# Altium PCB HGD_MCU(v0.2)-20200901.PcbDoc
Units mil, origin at the board's own origin, x right, y up, seen from the top; angles counter-clockwise.
Board outline 2265 x 2461.06 mil, 2 copper layers (TopLayer, BottomLayer); 55 components, 42 nets, 246 pads, 476 vias.
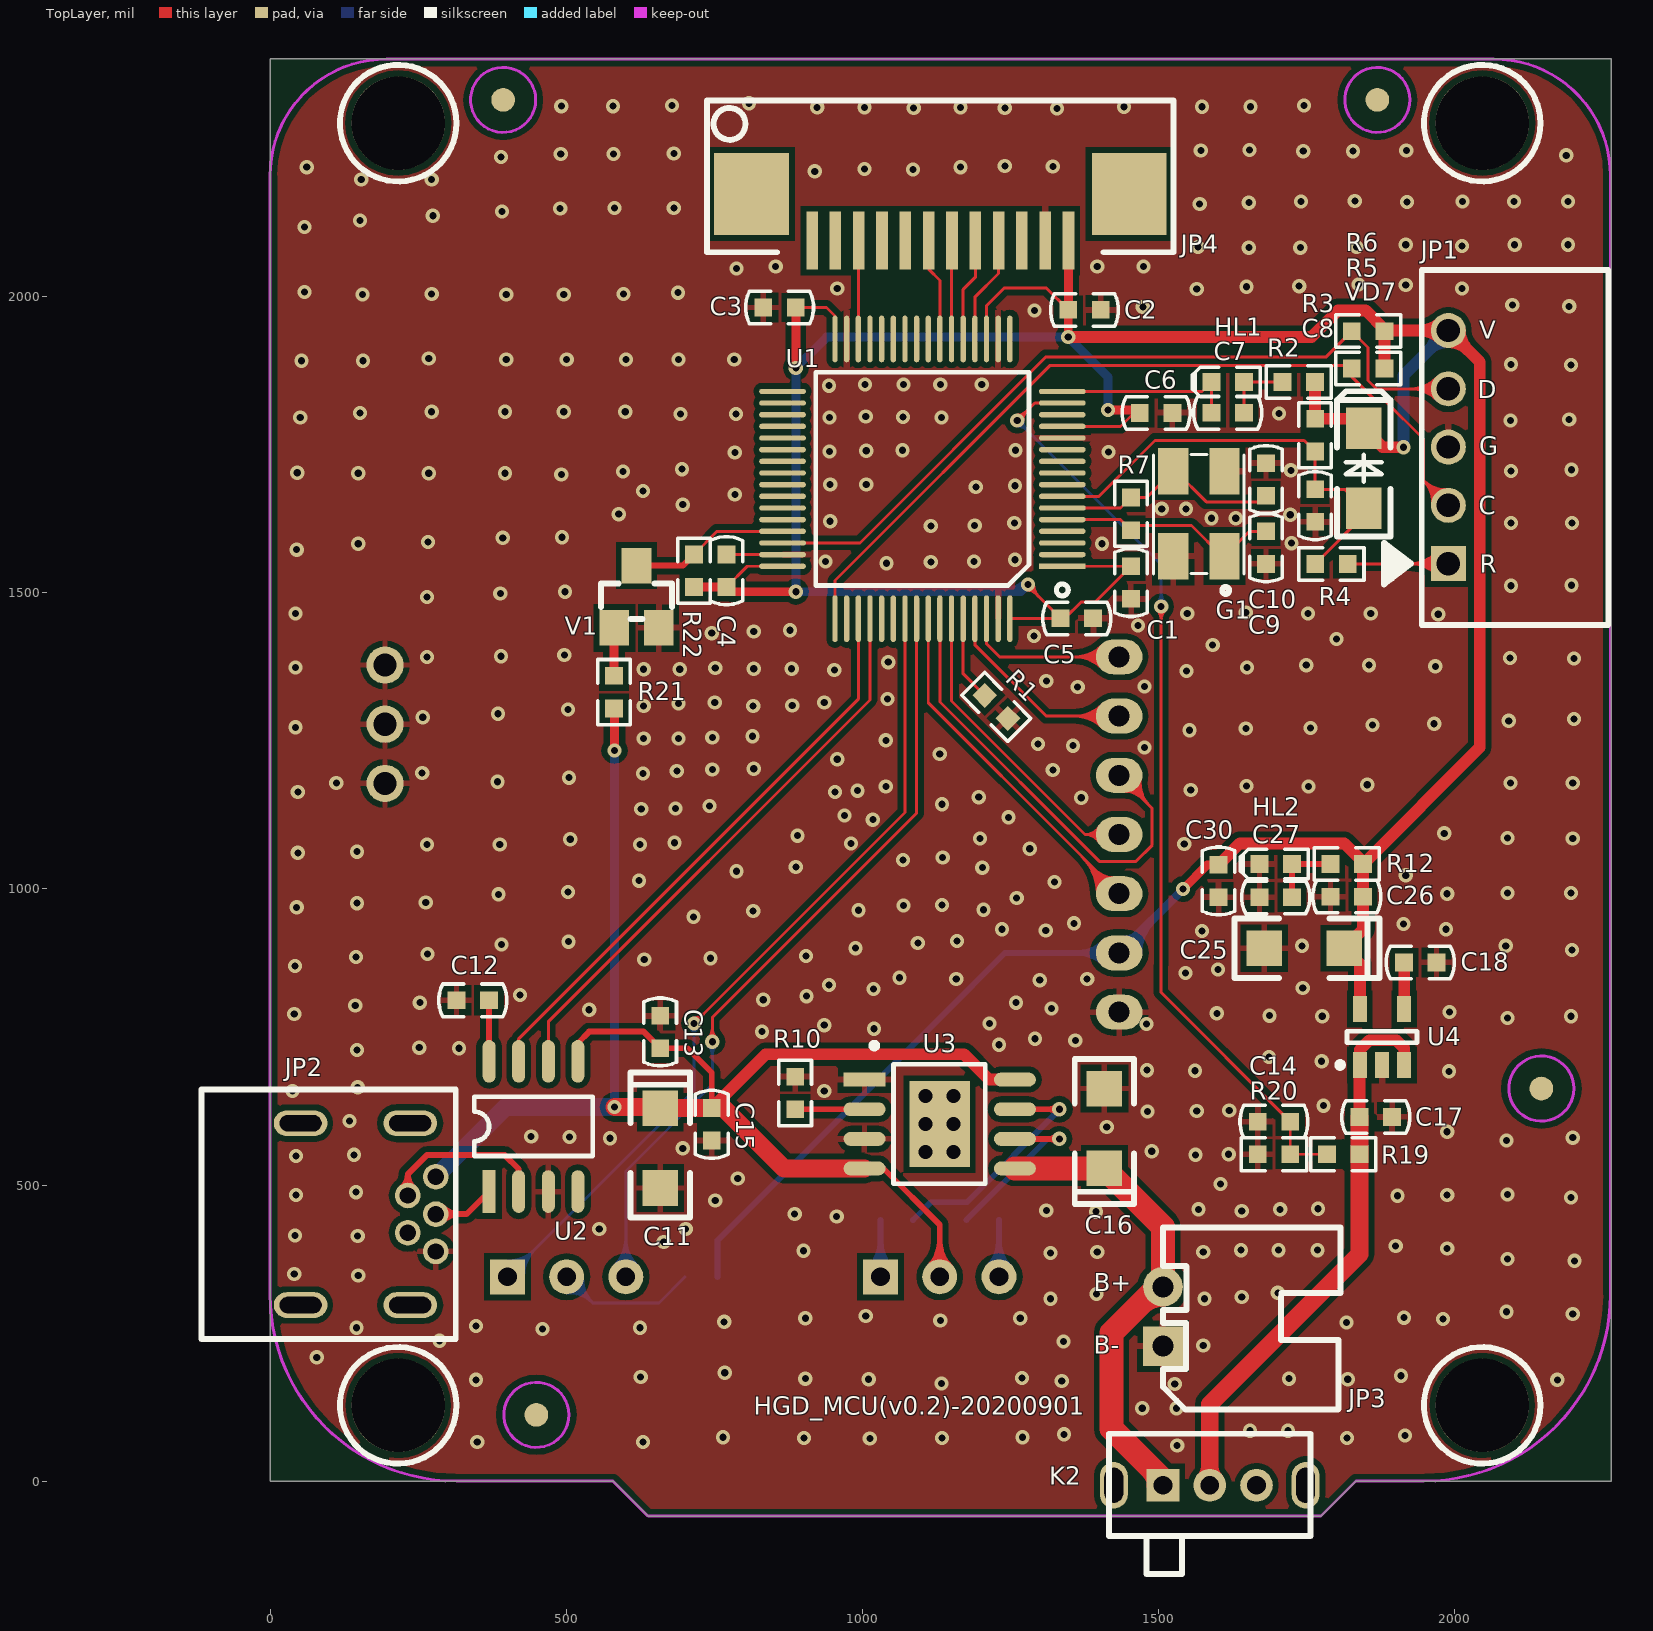
[diagram p0: TopLayer view]
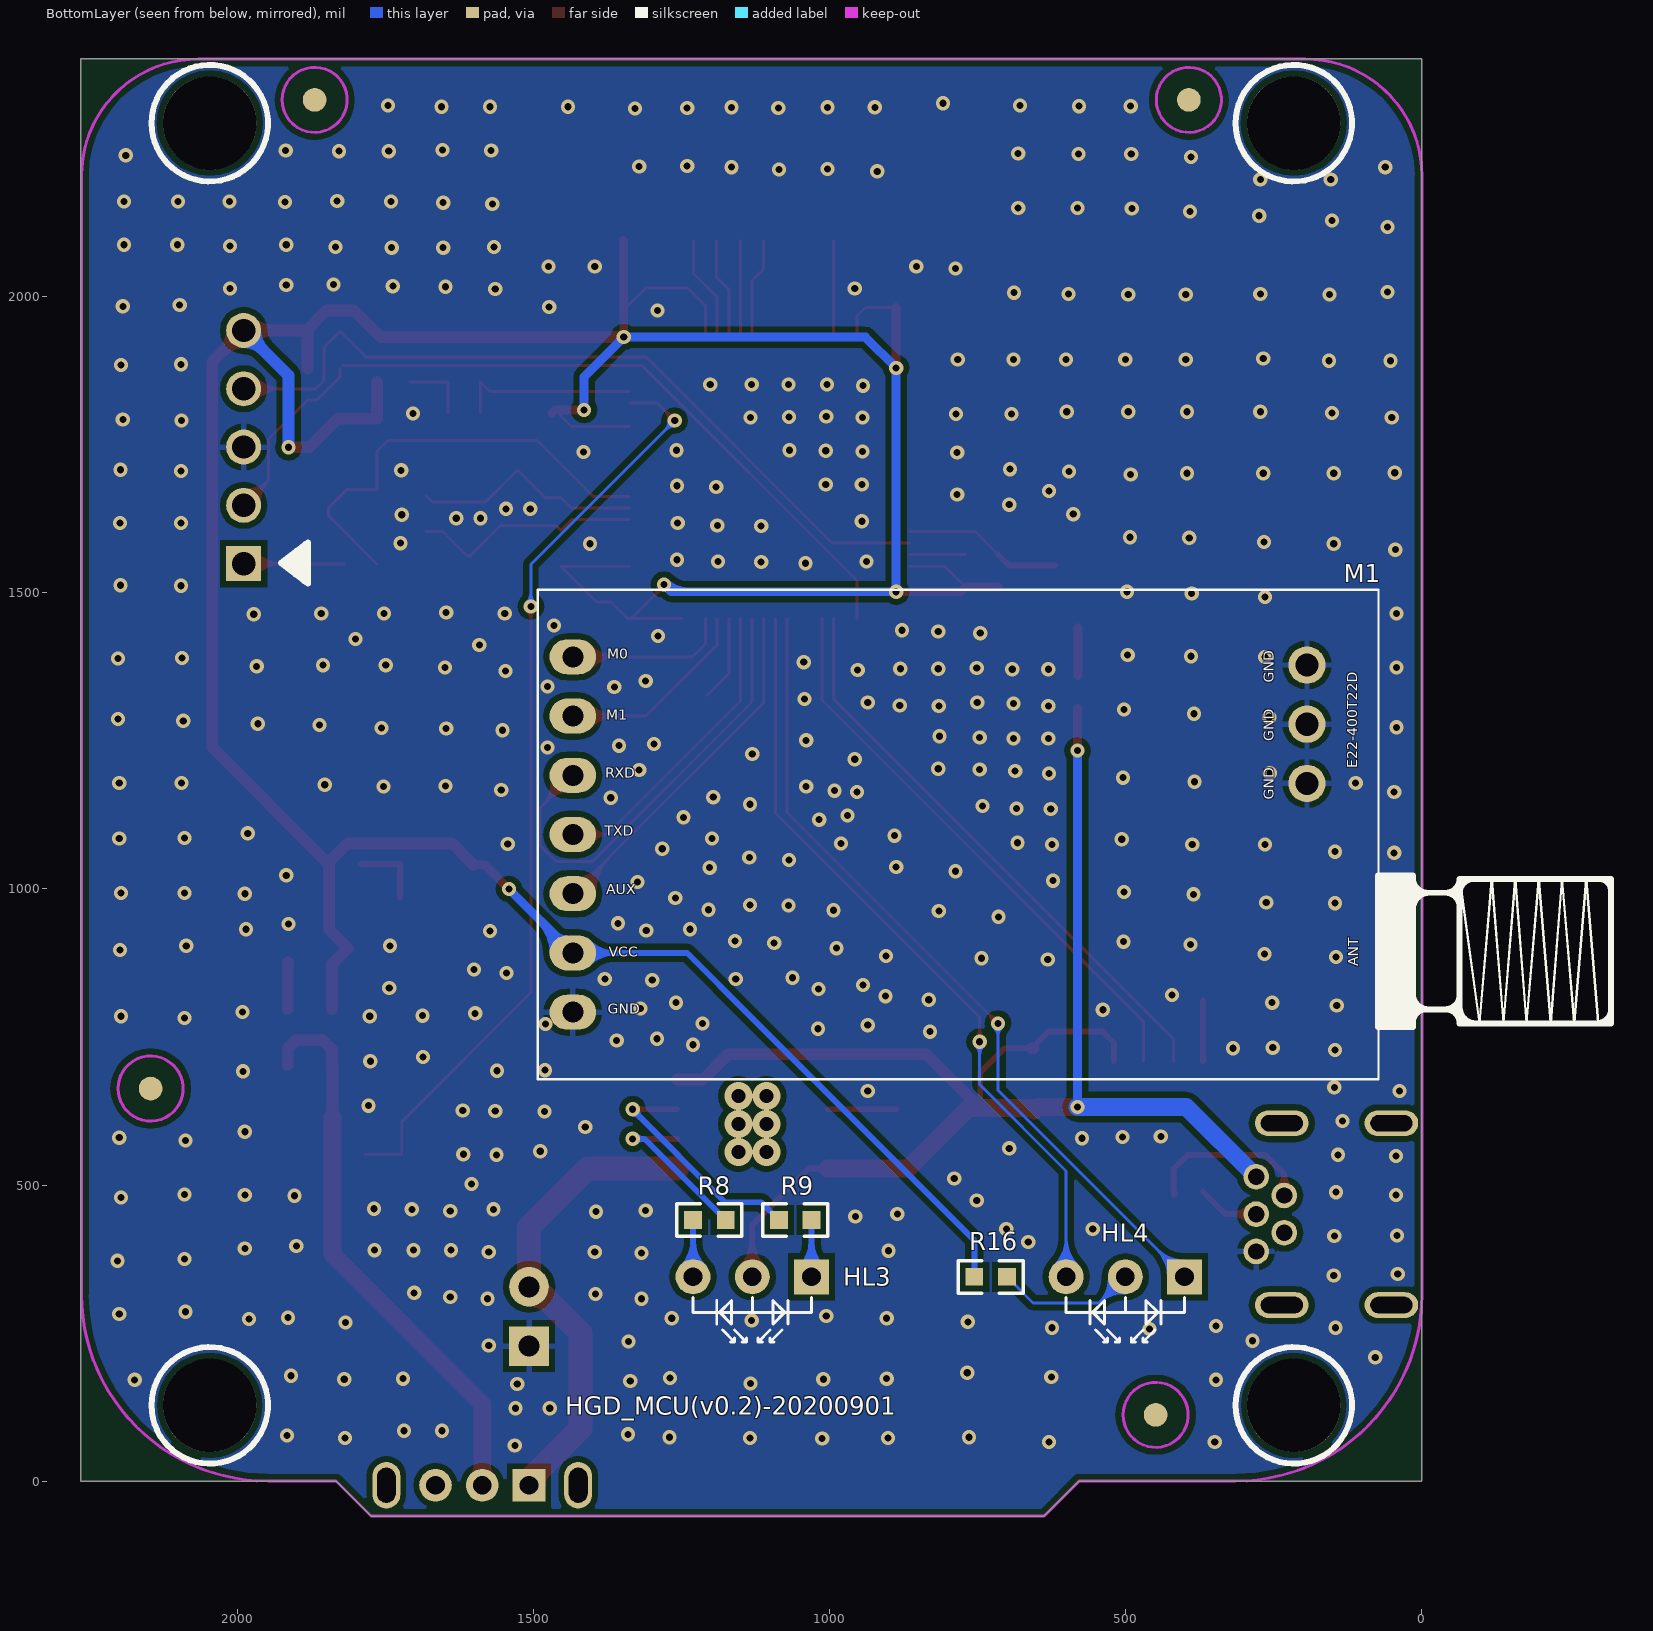
[diagram p1: BottomLayer view, seen from below]

## Layer stack, top to bottom
TopLayer: signal copper 1.4
Dielectric: core 12.6, FR-4, Dk 4.8
BottomLayer: signal copper 1.4

## Board outline
0,0 578.91,0 637.96,-59.06 1774.94,-59.06 1834,0 2215,0 2265,0 2265,2387 2265,2402 0,2402 0,0

## Design rules (kind name [scope] priority, off if disabled: settings)
Clearance Clearance_2 [InNet('RF_IN') vs InNet('GND')] p1: gap=19.68
Clearance [All] p2: gap=10
Clearance Clearance_1 [All] p3: gap=10
ComponentClearance [All] p1 off: gap=10 collisioncheckmode=3 verticalgap=10 showdistances=FALSE
FabricationTestPointUsage TestPointUsage [All] p1: valid=0 allowmultiple=FALSE
FabricationTestpoint Testpoint [(IsPad And (OnTopLayer Or OnBottomLayer))] p1: side=3 testpointundercomponent=TRUE minsize=40 maxsize=100 preferedsize=60 minholesize=20 maxholesize=40 preferedholesize=32 testpointgrid=1 allowsidetop=TRUE allowsidebottom=TRUE usegrid=TRUE gridtolerance=0.01
HoleSize [All] p1: absolutevalues=TRUE maxlimit=200 minlimit=1 maxpercent=80.000 minpercent=20.000
PolygonConnect [IsVia] p1: connectstyle=Direct reliefconductorwidth=10 reliefentries=4 polygonreliefangle="90 Angle"
PolygonConnect PolygonConnect_via [All] p2 off: connectstyle=Relief reliefconductorwidth=10 reliefentries=4 polygonreliefangle="90 Angle"
RoomDefinition HGD_MCU(v0.2)-20200901 [InComponentClass('HGD_MCU(v0.2)-20200901')] p1: confinementstyle=ConfineIn formatcopy=TRUE lockcomponents=FALSE outline -14648,-34893 -12648,-34893 -12648,-33893 -14648,-33893
RoutingVias [All] p1: holewidth=15.75 width=31.5 viastyle="Through Hole" minholewidth=11.81 minwidth=23.62 maxholewidth=19.68 maxwidth=39.37
ShortCircuit [All] p1 off: allowed=FALSE
SilkscreenOverComponentPads [All] p1: minsilkscreentomaskgap=10
SolderMaskExpansion [All] p1: expansion=4
Width [All] p1: maxlimit=100 minlimit=5 preferedwidth=10
22 further rules are at their usual default settings.

## Components (designator, comment, footprint, x,y, rotation, side; value= is the part's Value field where it differs from the comment)
C1 "100nF/25V/5%" C0603 1454,1490 r90 top
C2 "100nF/25V/5%" C0603 1348,1978 r0 top
C3 "100nF/25V/5%" C0603 888,1982 r180 top
C4 "100nF/25V/5%" C0603 771,1565 r270 top
C5 "100nF/25V/5%" C0603 1390,1457 r180 top
C6 "100nF/25V/5%" C0603 1524,1804 r180 top
C7 "100nF/25V/5%" C0603 1644.85,1804.25 r180 top
C8 "100nF/25V/5%" C0603 1765,1675 r270 top
C9 "20pF/25V/1%" C0603 1682,1549 r90 top
C10 "20pF/25V/1%" C0603 1682,1664 r90 top
C11 "10uF/25V/5%" C1206-1 659,630 r270 top
C12 "100nF/25V/5%" C0603 315,812 r0 top
C13 "100nF/25V/5%" C0603 659,731 r90 top
C14 "100nF/25V/5%" C0603 1723,607 r180 top
C15 "100nF/25V/5%" C0603 746,630 r270 top
C16 "10uF/25V/5%" C1206-1 1409,528 r90 top
C17 "100nF/25V/5%" C0603 1840,615 r0 top
C18 "10nF/25V/5%" C0603 1970,876 r180 top
C25 "2.2uF/25V/5%" C1206-1 1814,900 r180 top
C26 "100nF/25V/5%" C0603 1791,987 r0 top
C27 "100nF/25V/5%" C0603 1726,986 r180 top
C30 "100nF/25V/5%" C0603 1602,986 r90 top
G1 "16MHz" OSC5032 1612,1562 r90 top
HL1 "LED蓝灯" LED0603 1644.85,1856.25 r180 top
HL2 "LED蓝灯" LED0603 1726,1042 r180 top
HL3 "LED红绿双色" LED2_Common_Anode 1031,345 r0 bottom locked
HL4 "LED红绿双色" LED2_Common_Anode 401,345 r0 bottom locked
JP1 "SWD" XH2.54-5AW 1990,1451 r90 top locked
JP2 "MiniUSB-B" MiniUSB-B 280,450.89 r270 top locked
JP3 "XH2.54-2P" XH2.54-2AW 1508,278 r90 top
JP4 "FPC-12P" FPC-1.0MM-12P-W 1132,2095 r0 top locked
K2 "SK-12D07开关" SK-12D07 1587,-7 r0 top
M1 "E22-400T22D" E22-400T22D 1434,1392 r180 bottom locked
R1 "10K/5%" R0603 1246,1288 r135 top
R2 "10K/5%" R0603 1764.85,1856 r180 top
R3 "10K/5%" R0603 1765,1739 r90 top
R4 "1K/5%" R0603 1820,1549 r180 top
R5 "10K/5%" R0603 1827,1879 r0 top
R6 "10K/5%" R0603 1827,1942 r0 top
R7 "1M/1%" R0603 1454,1606 r90 top
R8 "1K/5%" R0603 1176,441 r0 bottom
R9 "1K/5%" R0603 1086,441 r180 bottom
R10 "1K5/5%" R0603 887,683 r270 top
R12 "2K/5%" R0603 1846,1042 r180 top
R16 "10K/5%" R0603 756,345 r180 bottom
R19 "10M/1%" R0603 1840,552 r180 top
R20 "10M/1%" R0603 1723,552 r180 top
R21 "10K/5%" R0603 581,1360 r270 top
R22 "1K/5%" R0603 716,1510 r90 top
U1 "STM32F105RCT6" LQFP64_STM32F105R 1338,1545 r180 top locked
U2 "CH340N" CH340N_SOP8 370,489 r0 top locked
U3 "TP4056" TP4056_SOP8_SOP127P600X175-8N 1131,603 r0 top locked
U4 "TPS73033DBVR" SGM2019_SOT23-5_95P280X125-5N 1878,750 r90 top
V1 "S8050" SOT-23 619,1546 r0 top
VD7 "1N4148" LL-34 1847,1643 r90 top

## Footprints (in the part's own frame and the unit in brackets; to place one, negate y for a bottom-side part, rotate by r counter-clockwise, add the part's x,y. Pads: shape width x height; smd on the part's side, far side on the other; paste and mask are expansions set on the pad)
C0603 [mil]
  rect 30x30 smd: 1(0,0) 2(55,0)
  silkscreen extent -30,-28 85,28
C1206-1 [mil] "C1206封装钽电容"
  rect 60x60 smd: 1(0,0) 2(135,0)
  silkscreen extent -60,-50 185,50
CH340N_SOP8 [mil]
  rect 22x72 smd: 1(0,0)
  oval 22x72 smd: 2(50,0) 3(100,0) 4(150,0) 5(150,220) 6(100,220) 7(50,220) 8(0,220)
  silkscreen extent -25,60 175,160
E22-400T22D [mm]
  oval 2x1.5 hole 0.9: 1(0,0) 2(0,-2.54) 3(0,-5.08) 4(0,-7.62) 5(0,-10.16) 6(0,-12.7) 7(0,-15.24)
  round 1.6 hole 1: 8(31.49,-5.43) 9(31.49,-2.89) 10(31.49,-0.35)
  silkscreen extent -1.51,-18.12 44.54,2.88
FPC-1.0MM-12P-W [mm] "FPC-1.0MM-12P-W：卧式，抽拉式上接，12P"
  rect 3.2x3.5 smd: 0(-8.1,2) 0(8.1,2)
  rect 0.5x2.5 smd: 1(-5.5,0) 2(-4.5,0) 3(-3.5,0) 4(-2.5,0) 5(-1.5,0) 6(-0.5,0) 7(0.5,0) 8(1.5,0) 9(2.5,0) 10(3.5,0) 11(4.5,0) 12(5.5,0)
  silkscreen extent -10,-0.5 10,6
LED2_Common_Anode [mm] "LED2_Common_Anode：双色3mm共阳极LED"
  rect 1.5x1.5 hole 0.8: 1(0,0)
  round 1.5 hole 0.8: 2(2.54,0) 3(5.08,0)
  silkscreen extent 0,0.89 5.08,2.79
LED0603 [mil]
  rect 30x30 smd: A(0,0) K(55,0)
  silkscreen extent -28,-25 87,25
LL-34 [mil] "开关二极管LL-34封装"
  rect 70x60 smd: A(0,0) K(135,0)
  silkscreen extent -48,-45 198,45
LQFP64_STM32F105R [mm]
  rect 2x0.229 smd: 1(0,0)
  oval 2x0.229 smd: 2(0,-0.5) 3(0,-1) 4(0,-1.5) 5(0,-2) 6(0,-2.5) 7(0,-3) 8(0,-3.5) 9(0,-4) 10(0,-4.5) 11(0,-5) 12(0,-5.5) 13(0,-6) 14(0,-6.5) 15(0,-7) 16(0,-7.5) 33(12,-7.5) 34(12,-7) 35(12,-6.5) 36(12,-6) 37(12,-5.5) 38(12,-5) 39(12,-4.5) 40(12,-4) 41(12,-3.5) 42(12,-3) 43(12,-2.5) 44(12,-2) 45(12,-1.5) 46(12,-1) 47(12,-0.5) 48(12,0)
  oval 0.229x2 smd: 17(2.25,-9.75) 18(2.75,-9.75) 19(3.25,-9.75) 20(3.75,-9.75) 21(4.25,-9.75) 22(4.75,-9.75) 23(5.25,-9.75) 24(5.75,-9.75) 25(6.25,-9.75) 26(6.75,-9.75) 27(7.25,-9.75) 28(7.75,-9.75) 29(8.25,-9.75) 30(8.75,-9.75) 31(9.25,-9.75) 32(9.75,-9.75) 49(9.75,2.25) 50(9.25,2.25) 51(8.75,2.25) 52(8.25,2.25) 53(7.75,2.25) 54(7.25,2.25) 55(6.75,2.25) 56(6.25,2.25) 57(5.75,2.25) 58(5.25,2.25) 59(4.75,2.25) 60(4.25,2.25) 61(3.75,2.25) 62(3.25,2.25) 63(2.75,2.25) 64(2.25,2.25)
  silkscreen extent -0.25,-8.32 10.57,1.27
MiniUSB-B [mm]
  oval 1.1x2.3 hole 0.7 slot 1.8 at 90 deg: 0(-3.9,-1.1) 0(-3.9,-5.8) 0(3.9,-1.1) 0(3.9,-5.8)
  round 1.1 hole 0.7: 1(-1.6,0) 2(-0.8,-1.2) 3(0,0) 4(0.8,-1.2) 5(1.6,0)
  silkscreen extent -5.35,-10.05 5.35,0.85
OSC5032 [mm]
  rect 2x1.3 smd: 1(0,0) 2(3.65,0) 3(3.65,2.2) 4(0,2.2)
  silkscreen extent -1.62,-0.84 4.37,3.05
R0603 [mil]
  rect 30x30 smd: 1(0,0) 2(55,0)
  silkscreen extent -28,-28 82,27
SGM2019_SOT23-5_95P280X125-5N [mm] "SOT23, 5-Leads, Body 3.0x3.0mm (max), Pitch 0.95mm, IPC Medium Density"
  rect 1.1x0.6 smd: 1(-1.2,0.95) 2(-1.2,0) 3(-1.2,-0.95) 4(1.2,-0.95) 5(1.2,0.95)
  silkscreen extent -1.32,-1.5 0.25,1.92, body extent -0.85,-1.51 0.85,1.51, height 1.25
SK-12D07 [mm]
  oval 1.2x2 hole 0.8 slot 1.5 at 90 deg: 0(-4.115,0) 0(4.115,0)
  rect 1.4x1.4 hole 0.8: 1(-2.007,0)
  round 1.4 hole 0.8: 2(0,0) 3(2.007,0)
  silkscreen extent -4.32,-3.81 4.32,2.21
SOT-23 [mil]
  rect 50x60 smd: B(-37.5,-105) C(0,0) E(37.5,-105)
  silkscreen extent -60,-90 60,-30
TP4056_SOP8_SOP127P600X175-8N [mm] "SOP, 8-Leads, Body 5.1x4.0mm (max), Pitch 1.27mm, IPC Medium Density"
  rect 2.6x3.7 smd: 0(0,0)
  rect 1.8x0.6 smd: 1(-3.225,1.905)
  oval 1.8x0.6 smd: 2(-3.225,0.635) 3(-3.225,-0.635) 4(-3.225,-1.905) 5(3.225,-1.905) 6(3.225,-0.635) 7(3.225,0.635) 8(3.225,1.905)
  silkscreen extent -2.93,-2.57 1.96,3.49, body extent -2,-2.55 2,2.55, height 1.75
XH2.54-2AW [mm] "2.54mm间距, 2P, 弯针插座"
  rect 1.7x1.7 hole 0.9: 1(-1.27,0)
  round 1.7 hole 0.9: 2(1.27,0)
  silkscreen extent -3.99,-7.62 3.81,0, body extent -3.77,-7.35 3.77,0.35, height 5.73
XH2.54-5AW [mm] "XH2.54-5P弯针插座"
  rect 1.5x1.5 hole 1: 1(2.5,0)
  round 1.5 hole 1: 2(5,0) 3(7.5,0) 4(10,0) 5(12.5,0)
  silkscreen extent -0.13,-6.86 15.1,2.75

## Part data
C1 C2 C3 C4 C5 C6 C8: library part CAP-SMD, "电容"
C7 C9 C10 C27: library part CAP, "电容"
C11 C16 C25: library part "Cap Pol1", "钽电容"
C12 C13 C15 C18 C26 C30: library part Cap, "电容"
C14 C17: library part CAP-SMD
G1: library part CRYSTAL_4, "两对电极压电晶体"
HL1 HL2: library part 发光二极管, "发光二极管"
HL3 HL4: library part LED2_Common_Anode, "LED2_Common_Anode：双色LED，共阳极"
JP1: library part JP_XH2.54-5AW, "XH2.54-5P直插插针"
JP2: "MiniUSB-B母头插座"
JP3: library part XH2.54-2AW, "XH2.54-2P弯针插座"
K2: library part SK-12D07, "SK-12D07：3脚2档小型拨动开关"
M1: "E22-400T22D LoRa模块"
R1 R2 R3 R4 R5 R6 R7 R8 R9 R10 R12 R16 R19 R20 R21 R22: library part RES2, "电阻"
U4: library part SGM2019, "SGM2019：Low Power, Low Dropout, RF Linear Regulators"
V1: library part NPN, "NPN三极管"
VD7: library part 开关二极管, "开关二极管"

## Free pads (board coordinates)
  round 157.48 hole 157.48: 0(216.54,127.95) 0(216.54,2293.31) 0(2047.24,127.95) 0(2047.24,2293.31)
  round 40 smd far side: 0(393.7,2332.68) 0(449.81,111.95) 0(1870.08,2332.68) 0(2147.08,662.95)
  round 40 smd: 1(393.7,2332.68) 1(449.81,111.95) 1(1870.08,2332.68) 1(2147.08,662.95)
  round 100 on Bottom Solder: 2(393.7,2332.68) 2(449.81,111.95) 2(1870.08,2332.68) 2(2147.08,662.95)
  round 100 on Top Solder: 3(393.7,2332.68) 3(449.81,111.95) 3(1870.08,2332.68) 3(2147.08,662.95)

## Via types
v1: diameter 24, hole 12, TopLayer to BottomLayer, tented both sides, 470 vias
v2: diameter 47.24, hole 23.62, TopLayer to BottomLayer, tented both sides, 6 vias

## Nets (pads, with @x,y where several pads share a name; then routed paths per layer and width w, separated by ;. In a path a pad name is that pad's centre, name@x,y a point inside that pad or via, vN(x,y) a via of type N, cw(c..) or ccw(c..) an arc to the next point about the centre after c; other vN are vias at no path point)
3V3: C1.2 C2.1 C3.1 C4.2 C5.2 C6.2 C25.1 C26.2 C30.2 JP1.5 JP4.12 M1.6 R2.1 R3.2 R5.2 R6.2 R12.1 R16.1 R22.1 U1.1 U1.13 U1.19 U1.32 U1.48 U1.64 U4.5 VD7.K | length 7412.5
  TopLayer w5: C4.2 806,1545 U1.48 ; C3.1 940,1982 954.14,1967.86 U1.32 ; U1.19 1210.05,1985.05 1240,2015 1311,2015 C2.1 ; U1.64@1250,1457 U1.64 C5.2@1334.42,1456.42 ; v1@1280,1504.5 cw(c1280,1486.39) 1292.8,1499.2 ; v1@1280,1512 C5.2 1342.32,1457 1369.82,1484.5 1393.5,1484.5 C1.2 U1.1 ; v1@1284.5,1514 ccw(c1300.19,1514) 1289.1,1502.9 ; v1@1289.5,1514 ccw(c1317.26,1514) 1297.63,1494.37 ; U1.13 1436.22,1781.22 C6.2@1459,1804
  TopLayer w15: R22.1 C4.2 ; C4.2@772,1509 C4.2 ; v1(888,1502) 779,1502 C4.2 ; v1(888,1880) C3.1 ; v1(1348,1932) C2.1 1348.54,1978.54 JP4.12 ; v1(1415,1809) 1464,1809 C6.2 ; v1(1542,1000) 1583,1041 C30.2 ; R6.2@1881.75,1942 R6.2
  TopLayer w20: v1(1348,1932) 1758.72,1932 1803.72,1977 1850.28,1977 1882,1945.28 R6.2 ; C30.2 1638,1077 1814.28,1077 1846,1045.28 R12.1 ; R2.1 1764.85,1794.15 R3.2 1831,1794 VD7.K 1879,1746 v1(1914,1746) ; U4.5 1840.6,873.4 C25.1 1846,932 C26.2 R12.1 ; R5.2 R6.2 ; JP1.5@1976.19,1929.32 ccw(c1942.86,1895.98) 1942.86,1943.13 ccw(c1942.86,1990.27) JP1.5@1976.19,1956.93 ; JP1.5@1990,1923.6 cw(c1990,1876.45) 2023.34,1909.79 cw(c2056.67,1943.13) JP1.5@2009.53,1943.13 ; R12.1 2043,1239 2043,1890.13 JP1.5 1883.13,1943.13 R6.2
  BottomLayer w5: M1.6@1430.5,888.5 M1.6
  BottomLayer w10: R16.1 756,406.82 1186,836.82 1186,837 1241,892 M1.6 ; M1.6@1406.81,874.66 ccw(c1364.94,832.79) 1364.94,892 ccw(c1364.94,951.21) M1.6@1406.81,909.34 ; M1.6@1413.89,881.73 ccw(c1389.08,856.93) 1389.08,892 ccw(c1389.08,927.07) M1.6@1413.89,902.27
  BottomLayer w15: 1240.17,1502 ccw(c1240.17,1553.83) v1@1276.82,1517.18 ; v1(1280,1514) 1268,1502 v1(888,1502) v1(888,1880) 940,1932 v1(1348,1932) 1415,1865 v1(1415,1809) ; M1.6 v1(1542,1000) ; M1.6@1443.84,914.03 ccw(c1443.84,943.44) 1464.64,922.64 ; M1.6@1450.87,892 cw(c1491.6,892) 1462.8,920.8 ; M1.6@1465.87,892 cw(c1542.81,892) 1488.41,946.41
  BottomLayer w20: v1(1914,1746) 1914,1867.13 JP1.5 ; JP1.5@1970.47,1943.13 cw(c1923.33,1943.13) 1956.66,1909.79 cw(c1990,1876.45) JP1.5@1990,1923.6
+5V: C11.1 C13.1 C15.1 HL3.2 JP2.1 R21.2 U2.5 U3.4 U3.8 | length 2917.4
  TopLayer w10: U2.5 520,740 539,759 631,759 C13.1 705,731 746,690 C15.1 ; U3.4 1036,528 1131,433 HL3.2 ; HL3.2@1113.66,362.34 ccw(c1071.79,404.21) 1131,404.21 ccw(c1190.21,404.21) HL3.2@1148.34,362.34 ; HL3.2@1120.73,355.27 ccw(c1095.93,380.07) 1131,380.07 ccw(c1166.07,380.07) HL3.2@1141.27,355.27
  TopLayer w15: R21.2 581.69,1304.31 v1(581.69,1233.69)
  TopLayer w20: C13.1@655.72,731 C13.1 ; C15.1 837,721 1172,721 1215,678 U3.8
  TopLayer w30: v1(581.69,631.89) 648.11,631.89 C11.1@654.5,625.5 ; C11.1 C15.1 766,630 868,528 U3.4 900,528
  BottomLayer w15: v1(581.69,631.89) v1(581.69,1233.69)
  BottomLayer w30: JP2.1 398.01,631.89 v1(581.69,631.89)
ADC_CO: JP4.8 U1.21 | length 174.6
  TopLayer w5: U1.21 1170.68,2012.68 1191.06,2033.06 JP4.8
ADC_H2S: JP4.7 U1.22 | length 166.4
  TopLayer w5: U1.22 1150.99,2094.31 JP4.7
ADC_LEL: JP4.6 U1.23 | length 174
  TopLayer w5: JP4.6 1112.32,2046.68 1131.31,2027.69 U1.23
ADC_O2: JP4.9 U1.20 | length 182.7
  TopLayer w5: U1.20 1190.36,1999.36 1230.43,2039.43 JP4.9
ADC_VOLT: C14.1 R19.2 R20.1 U1.15 | length 1724.7
  TopLayer w5: v1(1262,1791) 1291.59,1820.59 U1.15 ; v1@1262,1800.5 ccw(c1262,1823.43) 1278.22,1807.22 ccw(c1294.43,1791) v1@1271.5,1791 ; v1@1498.28,1470.28 cw(c1482.36,1454.36) 1504.88,1454.36 ; 1504.88,1453.77 cw(c1528.23,1453.77) v1@1511.72,1470.28 ; v1(1505,1477) 1504.88,1476.88 1504.88,1190.4 1504.88,871.53 1504.5,871.15 1504.5,825.5 C14.1 R20.1 R19.2
  BottomLayer w5: v1@1262,1781.5 cw(c1262,1758.57) 1278.22,1774.78 cw(c1294.43,1791) v1@1271.5,1791 ; v1(1262,1791) 1505,1548 v1(1505,1477) ; v1@1498.28,1483.72 ccw(c1482.07,1499.93) 1505,1499.93 ccw(c1527.93,1499.93) v1@1511.72,1483.72
BATT+: C16.1 JP3.2 K2.1 U3.5 | length 878.5
  TopLayer w40: U3.5 C16.1 1508,429 JP3.2 1498.64,328 1421,250.36 1421,88.58 1508,1.58 K2.1 ; 1469.04,298.4 cw(c1508,259.44) JP3.2@1508,314.54 ; K2.1@1489.03,20.55 cw(c1461.48,-7) K2.1@1500.44,-7
BATT_OUT: C17.1 K2.2 R19.1 U4.1 U4.3 | length 1003.4
  TopLayer w20: C17.1 1840,702.16 U4.1 1840.6,728.39 1856.61,744.41 1902.24,744.41 1915.4,731.25 U4.3
  TopLayer w30: K2.2@1578.12,1.88 ccw(c1556.68,23.32) 1587,23.32 ccw(c1617.32,23.32) K2.2@1595.88,1.88 ; K2.2 1587,130 1840,383 R19.1 C17.1
BEEP: JP4.3 U1.30 | length 166.4
  TopLayer w5: U1.30 993.51,2094.31 JP4.3
BOOT0: R1.2 U1.60 | length 144.6
  TopLayer w5: U1.60 1170.68,1363.32 R1.2
CHECK_POWER: R22.2 U1.45 V1.C | length 270.6
  TopLayer w5: R22.2 755.05,1604.05 U1.45
  TopLayer w10: V1.C 697,1546 R22.2
DEBUG_RX: U1.52 U2.6 | length 972.4
  TopLayer w5: U2.6 470,775.79 1013.2,1318.98 U1.52
DEBUG_TX: U1.51 U2.7 | length 985
  TopLayer w5: U2.7 420,747 993.51,1320.51 U1.51
DGND: C1.1 C2.2 C3.2 C4.1 C5.1 C6.1 C8.2 C9.1 C10.2 C11.2 C12.1 C13.2 C14.2 C15.2 C16.2 C17.2 C18.1 C25.2 C26.1 C27.2 C30.1 G1.2 G1.4 HL2.K JP1.3 JP2.5 JP3.1 JP4.11 M1.7 M1.8 M1.9 M1.10 R1.1 R10.1 R20.2 U1.12 U1.18 U1.31 U1.47 U1.63 U2.3 U3.1 U3.3 U4.2 V1.E | length 94.7
  TopLayer w5: C4.1 865.24,1565 U1.47
  other v1: 1532,60 350,66 630,66 1013,72 902,73 1135,73 1819,73 765,74 1271,74 1917,77 1341,79 1655,85 1719,85 1473,123 1531,123 1528,164 1134,165 1337,169 348,171 2174,171 1011,172 1820,172 904,173 1721,173 1270,174 626,176 1910,178 768,183 79,209 1576,229 1340,236 286,237 460,257 146,259 625,259 348,262 1818,268 767,269 1132,271 1981,274 904,275 1267,275 1915,276 1006,279 2200,282 2088,286 1318,308 1578,308 1641,311 1396,316 1702,318 149,347 41,350 2203,372 2090,375 1318,385 1397,387 1576,387 901,389 1640,390 1703,390 1769,390 1988,393 1901,397 665,404 148,414 42,415 556,426 702,426 957,447 886,451 1395,455 1641,456 1311,457 1568,459 1706,459 1770,460 752,474 2197,479 1904,482 44,483 1988,483 2090,484 145,488 1605,502 790,511 44,549 142,551 1563,551 1619,552 1489,557 697,562 2088,575 574,579 2200,580 506,581 441,582 1988,590 1413,598 134,608 1482,624 1565,625 1620,626 1779,634 38,659 936,659 148,665 1991,692 1562,693 1481,694 1776,709 1687,716 147,728 319,731 252,732 1231,737 1360,744 1292,747 831,759 1020,764 936,770 1480,772 1215,773 2090,782 1777,785 2197,785 1688,786 41,789 1599,790 1992,792 539,796 1320,798 144,803 253,808 1260,808 833,813 906,819 422,821 1019,831 1744,833 944,838 1300,846 1159,848 1380,848 1063,850 1546,858 1601,864 42,870 632,881 744,883 145,885 905,887 266,890 2199,897 989,900 1743,904 2087,904 391,906 1094,909 504,911 1160,912 1574,929 1310,930 1236,932 1986,932 1914,941 1358,942 715,953 816,963 994,964 1205,965 45,969 1070,972 1135,973 147,976 263,977 1261,985 386,991 1988,992 2090,993 2197,993 503,995 1325,1012 623,1014 1918,1023 788,1030 1203,1036 888,1037 1069,1049 1136,1053 47,1061 147,1063 1283,1068 265,1075 388,1075 625,1075 1544,1076 981,1077 683,1078 507,1084 1199,1085 2200,1085 2090,1086 891,1090 1983,1094 1018,1117 1247,1121 970,1124 627,1135 685,1136 742,1140 1135,1143 1370,1154 1197,1155 47,1164 954,1164 992,1166 1555,1167 1040,1173 1754,1173 1649,1174 1853,1176 112,1179 2095,1179 2200,1179 384,1181 505,1188 630,1195 257,1196 687,1199 1322,1201 747,1202 817,1203 958,1219 1131,1228 1477,1239 1356,1242 1297,1245 1040,1251 631,1254 690,1254 747,1256 815,1258 1553,1268 1648,1271 1757,1272 43,1273 1862,1277 1966,1279 2092,1284 2202,1287 258,1290 385,1296 503,1303 631,1309 816,1309 882,1310 690,1313 751,1315 936,1315 1043,1321 1364,1341 1477,1342 1311,1351 1548,1368 953,1370 631,1371 692,1371 817,1372 881,1372 752,1373 43,1374 1650,1374 1968,1376 1750,1378 1856,1378 1044,1383 2202,1389 2094,1390 265,1392 390,1393 497,1395 1592,1412 1801,1422 1290,1427 746,1432 817,1435 878,1437 1466,1445 1973,1464 43,1465 1549,1465 1753,1465 1859,1465 1648,1467 265,1493 389,1499 498,1502 2096,1512 2198,1513 1041,1550 1116,1552 938,1553 1189,1553 1258,1556 45,1573 149,1583 1405,1583 1725,1584 267,1586 393,1593 493,1594 1116,1613 1190,1614 1257,1618 2096,1618 2199,1618 946,1621 1590,1626 1631,1626 1723,1632 589,1633 1506,1642 1547,1642 697,1649 785,1666 630,1672 1192,1679 1258,1681 946,1683 1007,1683 492,1700 149,1702 268,1702 397,1702 46,1703 596,1705 2096,1706 1724,1707 2198,1708 696,1709 785,1737 1416,1738 945,1739 1007,1740 1068,1741 1259,1741 2095,1791 2194,1793 51,1796 945,1796 1134,1796 1069,1797 1006,1798 693,1802 787,1802 1704,1803 152,1804 273,1806 397,1806 496,1806 600,1806 944,1850 1005,1852 1070,1852 1132,1852 1202,1852 2197,1885 2096,1886 53,1892 157,1892 399,1894 501,1894 601,1894 690,1894 784,1894 268,1896 1291,1977 1474,1983 2194,1984 2098,1986 156,2004 399,2004 496,2004 273,2005 597,2005 689,2007 58,2008 1565,2013 958,2014 2013,2014 1649,2017 1738,2018 1918,2020 1838,2021 788,2048 854,2051 1397,2051 1475,2051 1653,2083 1740,2083 1567,2084 1835,2084 2013,2086 1918,2088 2102,2088 2192,2088 58,2118 152,2129 275,2137 392,2144 490,2149 582,2150 682,2150 1570,2157 1653,2159 1920,2160 1741,2161 2014,2161 2101,2161 2192,2161 1832,2162 154,2198 273,2198 920,2212 1086,2215 1004,2216 62,2219 1166,2219 1322,2220 1241,2221 390,2236 2189,2239 491,2241 580,2241 682,2242 1745,2246 1829,2246 1572,2247 1919,2247 1654,2248 1329,2318 1087,2319 1241,2319 924,2320 1004,2320 1166,2320 1442,2321 1574,2321 1656,2321 492,2322 579,2322 679,2323 1746,2323 809,2327
E22_AUX: M1.5 U1.57 | length 908.4
  TopLayer w5: U1.57 1111.62,1314.38 1361,1065 M1.5 ; 1371.06,1054.94 cw(c1308.12,992) M1.5@1397.13,992 ; 1379.59,1046.41 cw(c1325.19,992) M1.5@1402.13,992 ; 1388.13,1037.87 cw(c1342.26,992) M1.5@1407.13,992 ; 1394.82,1031.18 ccw(c1424.16,1060.52) M1.5@1424.16,1019.03 ; 1396.67,1029.33 cw(c1359.33,992) M1.5@1412.13,992 ; 1403.36,1022.64 ccw(c1424.16,1043.44) M1.5@1424.16,1014.03 ; 1405.2,1020.8 cw(c1376.4,992) M1.5@1417.13,992
E22_M0: M1.1 U1.62 | length 526.1
  TopLayer w5: U1.62 1210.05,1413.95 1232,1392 M1.1 ; M1.1@1405.05,1372.89 ccw(c1358.91,1326.75) 1358.91,1392 ccw(c1358.91,1457.25) M1.1@1405.05,1411.11 ; M1.1@1408.58,1376.42 ccw(c1370.98,1338.82) 1370.98,1392 ccw(c1370.98,1445.18) M1.1@1408.58,1407.58 ; M1.1@1412.12,1379.96 ccw(c1383.05,1350.89) 1383.05,1392 ccw(c1383.05,1433.11) M1.1@1412.12,1404.04
E22_M1: M1.2 U1.61 | length 588.1
  TopLayer w5: U1.61 1190.36,1412.42 1310.79,1292 M1.2 ; M1.2@1405.05,1272.89 ccw(c1358.91,1226.75) 1358.91,1292 ccw(c1358.91,1357.25) M1.2@1405.05,1311.11 ; M1.2@1408.58,1276.42 ccw(c1370.98,1238.82) 1370.98,1292 ccw(c1370.98,1345.18) M1.2@1408.58,1307.58 ; M1.2@1412.12,1279.96 ccw(c1383.05,1250.89) 1383.05,1292 ccw(c1383.05,1333.11) M1.2@1412.12,1304.04
E22_RX: M1.4 U1.59 | length 701
  TopLayer w5: 1150.99,1415.01 U1.59 1150.99,1317.43 1376.43,1092 ; M1.4@1400.98,1078.1 ccw(c1376.43,1063.37) 1376.43,1092 ; M1.4@1400.98,1105.9 cw(c1376.43,1120.63) 1376.43,1092 ; M1.4@1405.27,1080.67 ccw(c1385.26,1068.67) 1385.26,1092 ccw(c1385.26,1115.33) M1.4@1405.27,1103.33 ; M1.4@1409.56,1083.24 ccw(c1394.09,1073.96) 1394.09,1092 ccw(c1394.09,1110.04) M1.4@1409.56,1100.76 ; M1.4 1376.43,1092
E22_TX: M1.3 U1.58 | length 981.7
  TopLayer w5: U1.58 1131.31,1315.91 1400.54,1046.67 1462.67,1046.67 1489.88,1073.88 1489.88,1136.12 M1.3 ; M1.3@1443.84,1164.97 cw(c1443.84,1123.48) 1473.18,1152.82 ; M1.3@1443.84,1169.97 cw(c1443.84,1140.56) 1464.64,1161.36 cw(c1487.48,1184.2) M1.3@1455.68,1189.88 ; M1.3@1460.6,1189 ccw(c1498.97,1182.15) 1471.41,1154.59 ; M1.3@1465.53,1188.12 ccw(c1510.46,1180.09) 1478.18,1147.82 ; M1.3@1470.45,1187.24 ccw(c1521.95,1178.04) 1484.96,1141.04
MCU_LED: C7.2 HL1.K U1.16 | length 310.5
  TopLayer w5: U1.16 1573.87,1840.27 HL1.K C7.2
NetC7_1: C7.1 HL1.A R2.2 | length 117.1
  TopLayer w5: C7.1 HL1.A 1709.6,1856.25 R2.2
NetC12_2: C12.2 U2.8 | length 103
  TopLayer w10: U2.8 C12.2
NetC18_2: C18.2 U4.4 | length 78.9
  TopLayer w20: C18.2 1915.4,875.6 U4.4
NetC27_1: C27.1 HL2.A R12.2 | length 121
  TopLayer w10: C27.1 HL2.A R12.2
NetHL3_1: HL3.1 R9.2 | length 244.1
  BottomLayer w10: HL3.1@1013.66,362.34 ccw(c971.79,404.21) 1031,404.21 ccw(c1090.21,404.21) HL3.1@1048.34,362.34 ; HL3.1@1020.73,355.27 ccw(c995.93,380.07) 1031,380.07 ccw(c1066.07,380.07) HL3.1@1041.27,355.27 ; HL3.1 R9.2
NetHL3_3: HL3.3 R8.2 | length 244.1
  BottomLayer w10: HL3.3@1213.66,362.34 ccw(c1171.79,404.21) 1231,404.21 ccw(c1290.21,404.21) HL3.3@1248.34,362.34 ; HL3.3@1220.73,355.27 ccw(c1195.93,380.07) 1231,380.07 ccw(c1266.07,380.07) HL3.3@1241.27,355.27 ; HL3.3 R8.2
NetHL4_2: HL4.2 R16.2 | length 469.3
  BottomLayer w5: HL4.2 545,301 ; HL4.2@501.58,327.98 cw(c502.83,291.39) 528.72,317.28 cw(c554.61,343.17) HL4.2@518.02,344.42 ; HL4.2@501.75,322.99 cw(c503.37,275.65) 536.86,309.14 cw(c570.35,342.63) HL4.2@523.01,344.25 ; HL4.2@501.92,317.99 cw(c503.91,259.91) 545,301 ; HL4.2@528.01,344.08 ccw(c586.09,342.09) 545,301 ; R16.2 657,301 545,301
NetJP1_1: JP1.1 R4.1 | length 444.7
  TopLayer w5: R4.1 1989.57,1549 JP1.1 ; 1923.72,1549 ccw(c1923.72,1615.7) JP1.1@1970.89,1568.54 ; 1925.78,1549 cw(c1925.78,1485.2) JP1.1@1970.89,1530.31 ; 1935.79,1549 ccw(c1935.79,1603.63) JP1.1@1974.42,1565 ; 1937.85,1549 cw(c1937.85,1497.27) JP1.1@1974.42,1533.85 ; 1947.87,1549 ccw(c1947.87,1591.56) JP1.1@1977.96,1561.47 ; 1949.92,1549 cw(c1949.92,1509.34) JP1.1@1977.96,1537.38 ; 1959.94,1549 ccw(c1959.94,1579.49) JP1.1@1981.5,1557.93
NetR8_1: R8.1 U3.6 | length 395
  TopLayer w10: U3.6 v1(1333,578) ; 1316.1,578 cw(c1316.1,561.1) 1328.05,573.05 ccw(c1316.1,561.1) 1316.1,578 ; 1316.1,578 ccw(c1316.1,594.9) 1328.05,582.95 cw(c1316.1,594.9) 1316.1,578
  BottomLayer w10: R8.1 1313,578 v1(1333,578) ; 1316.1,578 cw(c1316.1,561.1) 1328.05,573.05 ccw(c1316.1,561.1) 1316.1,578 ; 1316.1,578 ccw(c1316.1,594.9) 1328.05,582.95 cw(c1316.1,594.9) 1316.1,578
NetR9_1: R9.1 U3.7 | length 453.2
  TopLayer w10: U3.7 v1(1333,628) ; v1@1328.05,623.05 ccw(c1316.1,611.1) 1316.1,628 ccw(c1316.1,644.9) v1@1328.05,632.95
  BottomLayer w10: R9.1 1116,471 1177,471 1333,627 v1(1333,628) ; 1320.34,614.34 ccw(c1306.69,628) v1@1326,628 ; 1322.76,616.76 cw(c1333,606.51) v1@1333,621
NetR10_2: R10.2 U3.2 | length 117
  TopLayer w10: R10.2 U3.2
NetR21_1: R21.1 V1.B | length 81.2
  TopLayer w15: R21.1 581,1440.5 V1.B
OSC_IN: C9.2 G1.1 R7.1 U1.5 | length 393.5
  TopLayer w5: U1.5 1436.26,1623.74 R7.1 1461.87,1613.87 1556.15,1613.87 1608.02,1562 G1.1 1654,1604 C9.2
OSC_OUT: C10.1 G1.3 R7.2 U1.6 | length 395.5
  TopLayer w5: U1.6 1436.42,1643.42 R7.2 1480.68,1661 G1.3 1529.36,1705.7 1581.23,1653.83 1671.83,1653.83 C10.1
RESET: C8.1 R3.1 R4.2 U1.7 VD7.A | length 761
  TopLayer w5: U1.7 1400.16,1663.11 1494.62,1757.57 1746.43,1757.57 R3.1 C8.1 1815,1675 VD7.A 1847,1631 R4.2
SOC0: HL4.1 U1.55 | length 1712.1
  TopLayer w5: v1(716,773) 1072.25,1129.25 U1.55 ; v1@716,782.5 ccw(c716,805.43) 732.22,789.22 ccw(c748.43,773) v1@725.5,773
  BottomLayer w5: HL4.1 716,660 v1(716,773) ; HL4.1@401,362.03 ccw(c401,403.14) 430.07,374.07 ccw(c459.14,345) HL4.1@418.03,345 ; HL4.1@401,367.03 ccw(c401,420.21) 438.6,382.6 ccw(c476.21,345) HL4.1@423.03,345 ; HL4.1@401,372.03 ccw(c401,437.28) 447.14,391.14 ccw(c493.28,345) HL4.1@428.03,345 ; v1@709.28,766.28 cw(c693.07,750.07) 716,750.07 cw(c738.93,750.07) v1@722.72,766.28
SOC1: HL4.3 U1.56 | length 1637.4
  TopLayer w5: v1@740.28,748.72 ccw(c724.07,764.93) 747,764.93 ccw(c769.93,764.93) v1@753.72,748.72 ; v1(747,742) 747,782.79 1091.94,1127.72 U1.56
  BottomLayer w5: HL4.3@581.89,364.11 ccw(c535.75,410.25) 601,410.25 ccw(c666.25,410.25) HL4.3@620.11,364.11 ; HL4.3@585.42,360.58 ccw(c547.82,398.18) 601,398.18 ccw(c654.18,398.18) HL4.3@616.58,360.58 ; HL4.3@588.96,357.04 ccw(c559.89,386.11) 601,386.11 ccw(c642.11,386.11) HL4.3@613.04,357.04 ; HL4.3 601,523.79 747,669.79 v1(747,742) ; v1@740.28,735.28 cw(c724.07,719.07) 747,719.07 cw(c769.93,719.07) v1@753.72,735.28
SWCLK: JP1.2 R5.1 U1.49 | length 1607.2
  TopLayer w5: U1.49 954.14,1521.14 1316.75,1883.75 R5.1@1822.25,1883.75 ; R5.1 1827,1865.11 1866.61,1825.5 1882.18,1825.5 1947.97,1759.71 1947.97,1689.88 ; JP1.2@1963.04,1649.69 ccw(c1911.32,1653.22) 1947.97,1689.88 ; JP1.2@1968.02,1649.35 ccw(c1925.88,1652.23) 1955.75,1682.1 ccw(c1985.62,1711.97) JP1.2@1988.5,1669.83 ; JP1.2@1973.01,1649.01 ccw(c1940.43,1651.24) 1963.52,1674.33 ccw(c1986.61,1697.42) JP1.2@1988.84,1664.84 ; JP1.2@1988.16,1674.82 cw(c1984.63,1726.53) 1947.97,1689.88 ; JP1.2 1947.97,1689.88
SWDIO: JP1.4 R6.1 U1.46 | length 1596.1
  TopLayer w5: U1.46 996.16,1584.37 1310.54,1898.75 1783.75,1898.75 R6.1 1854.5,1914.5 1854.5,1858.82 1868.62,1844.7 JP1.4 ; JP1.4@1970.89,1825.59 ccw(c1924.75,1779.45) 1924.75,1844.7 ccw(c1924.75,1909.95) JP1.4@1970.89,1863.81 ; JP1.4@1974.42,1829.13 ccw(c1936.82,1791.52) 1936.82,1844.7 ccw(c1936.82,1897.88) JP1.4@1974.42,1860.28 ; JP1.4@1977.96,1832.66 ccw(c1948.89,1803.59) 1948.89,1844.7 ccw(c1948.89,1885.81) JP1.4@1977.96,1856.74
USBD+: JP2.3 U2.1 | length 168.9
  TopLayer w10: JP2.3 331.89,450.89 U2.1 ; JP2.3@291.78,439.11 cw(c320.21,410.68) 320.21,450.89 cw(c320.21,491.09) JP2.3@291.78,462.67
USBD-: JP2.2 U2.2 | length 341.1
  TopLayer w10: JP2.2@221.95,495.06 ccw(c201.99,518.47) 232.76,518.47 ; JP2.2 232.76,518.47 ; JP2.2@243.56,495.06 cw(c263.53,518.47) 232.76,518.47 ; U2.2@416.5,485.5 U2.2@419,483 ; U2.2 420,527 396.46,550.54 264.82,550.54 232.76,518.47
pads on no net: JP2.0 JP2.4 JP4.0 JP4.1 JP4.2 JP4.4 JP4.5 JP4.10 K2.0 K2.3 U1.2 U1.3 U1.4 U1.8 U1.9 U1.10 U1.11 U1.14 U1.17 U1.24 U1.25 U1.26 U1.27 U1.28 U1.29 U1.33 U1.34 U1.35 U1.36 U1.37 U1.38 U1.39 U1.40 U1.41 U1.42 U1.43 U1.44 U1.50 U1.53 U1.54 U2.4 U3.0
copper on no net:
  other v2: 1107.38,555.76 1154.62,555.76 1107.38,603 1154.62,603 1107.38,650.24 1154.62,650.24

## Polygon pours and split planes (outlines as drawn)
DGND on TopLayer "TopLayer-No Net" (solid, remove dead copper): 0,-59 2265,-59 2265,2402 0,2402 0,-59
DGND on BottomLayer "TopLayer-No Net" (solid, remove dead copper): 0,-59 2265,-59 2265,2402 0,2402 0,-59

## Keep-outs
TopLayer:
  circle w5: c1870.08,2332.68 r55
  circle w5: c393.7,2332.68 r55
  circle w5: c449.81,111.95 r55
  circle w5: c2147.08,662.95 r55
BottomLayer:
  circle w5: c1870.08,2332.68 r55
  circle w5: c393.7,2332.68 r55
  circle w5: c449.81,111.95 r55
  circle w5: c2147.08,662.95 r55
KeepOutLayer:
  lines w5: 0,314.96 ccw(c314.96,314.96) 314.96,0 578.91,0 637.96,-59.06 1774.94,-59.06 1834,0 1948.82,0 ccw(c1948.82,314.96) 2263.78,314.96 2263.78,2204.72 ccw(c2066.93,2204.72) 2066.93,2401.57 196.85,2401.57 ccw(c196.85,2204.72) 0,2204.72 0,314.96

## Silkscreen, mask and mechanical layers (free items; w line width, h text height)
TopOverlay:
  circle w10: c216.54,127.95 r98.43
  circle w10: c2047.24,127.95 r98.43
  circle w10: c216.54,2293.31 r98.43
  circle w10: c2047.24,2293.31 r98.43
  text "V" at 2042,1929 h30
  text "D" at 2040,1829 h30
  text "G" at 2042,1733 h30
  text "C" at 2041,1633 h30
  text "R" at 2043,1534 h30
  text "B+" at 1391,321 h30
  text "B-" at 1390.74,215.41 h30
  text "HGD_MCU(v0.2)-20200901" at 817,112 h30
BottomOverlay:
  circle w10: c216.54,127.95 r98.43
  circle w10: c2047.24,127.95 r98.43
  circle w10: c216.54,2293.31 r98.43
  circle w10: c2047.24,2293.31 r98.43
  text "HGD_MCU(v0.2)-20200901" at 1447,112 h30

## Text inside footprints (layer, text, board x,y; h text height)
M1: BottomOverlay "GND" at 1375,783 h30; BottomOverlay "VCC" at 1373,880 h30; BottomOverlay "AUX" at 1378,985 h30; BottomOverlay "TXD" at 1380.13,1084 h30; BottomOverlay "RXD" at 1379,1182 h30; BottomOverlay "M0" at 1376,1383 h30; BottomOverlay "ANT" at 102.06,869.52 h30 r270; BottomOverlay "GND" at 244.77,1347.87 h30 r270; BottomOverlay "GND" at 244.77,1249.44 h30 r270; BottomOverlay "GND" at 244.77,1151.02 h30 r270